# EAGLE board geikoduino_328p_DIP_final (EAGLE 7.6.0)
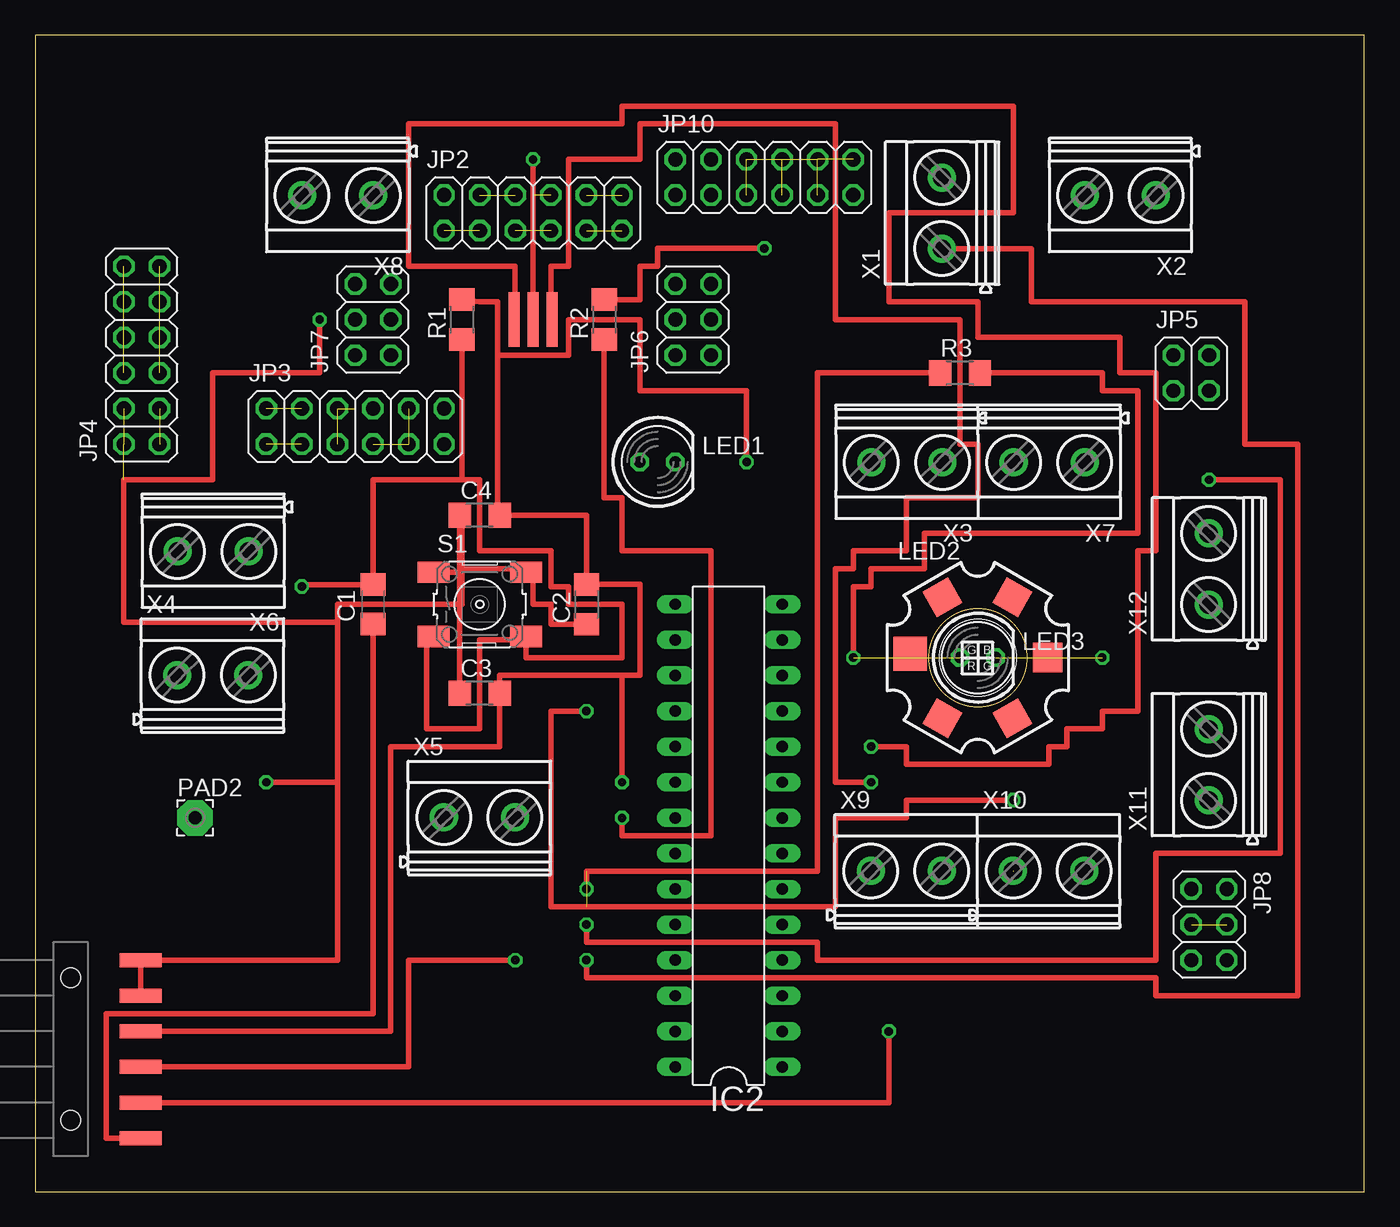
[diagram p0: board, top side]
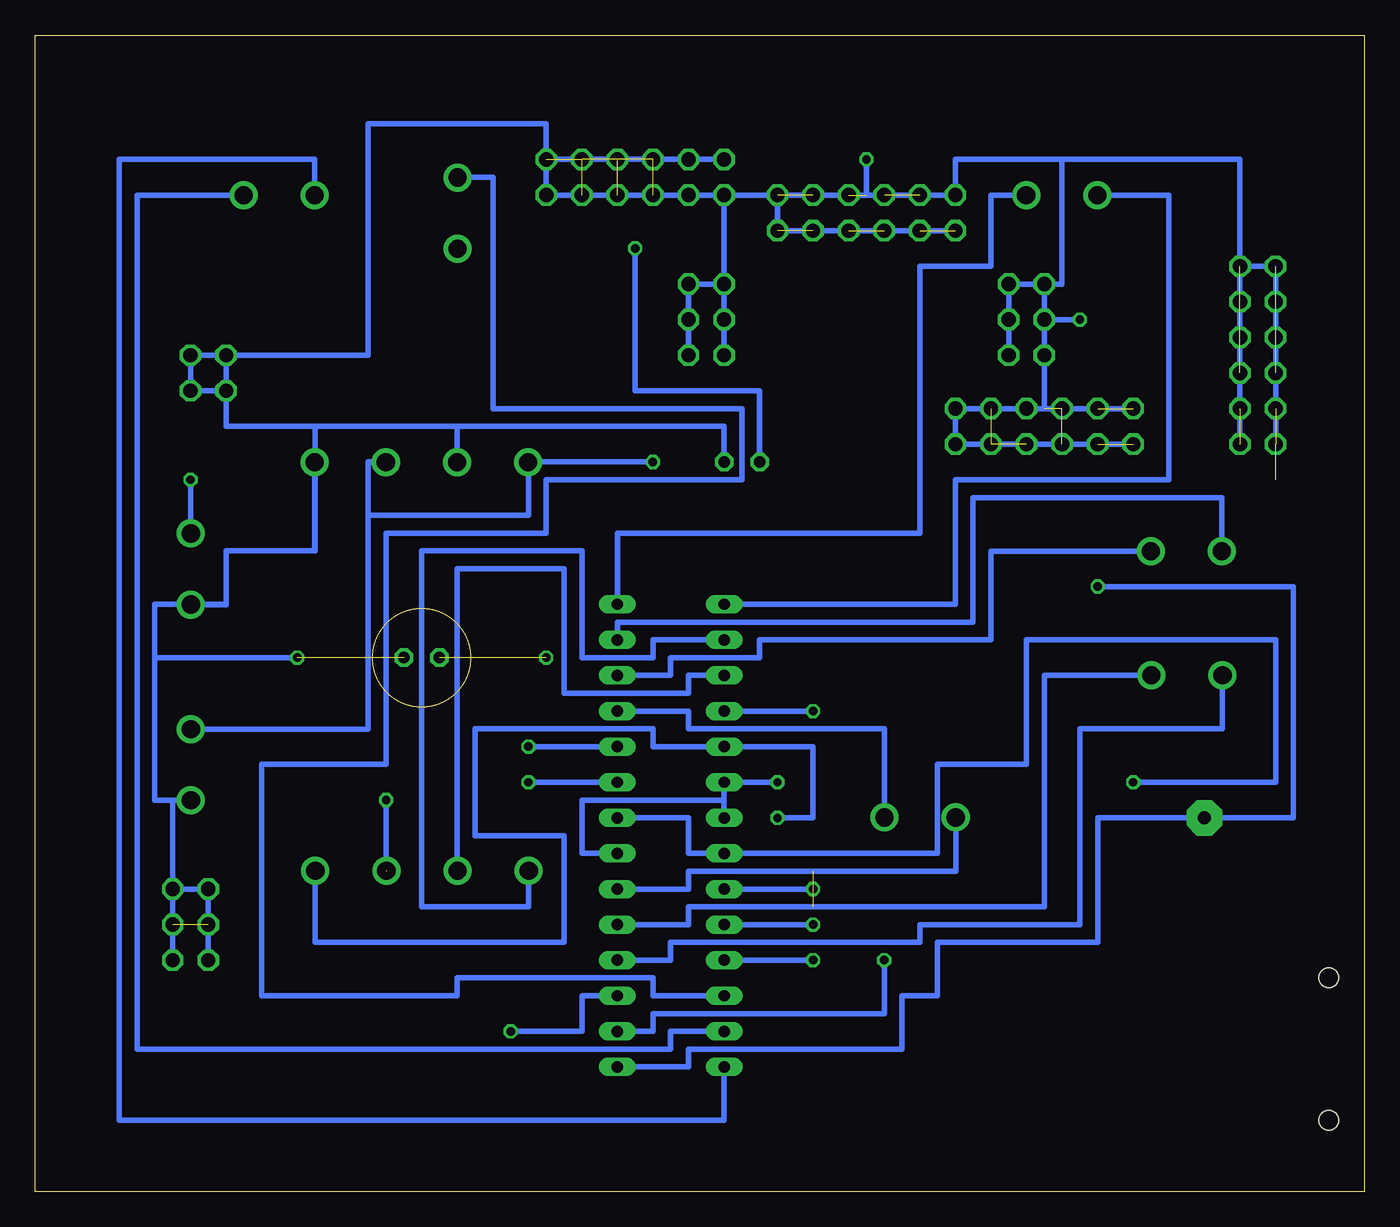
[diagram p1: board, bottom side, seen from below]

Size 94.92 x 82.54 mm. Coordinates in mm from the lower left corner, seen from the top.
Outline: 0,0 94.92,0 94.92,82.54 0,82.54 0,0
Copper layers (1*16): Top 0.035mm / dielectric 1.5mm / Bottom 0.035mm
Design rules "default": minimum track width 10mil, minimum drill 24mil, track to track 8mil, track to pad 8mil, pad to pad 8mil, via to via 8mil, smd to smd 8mil, copper to edge 40mil, drill to drill 8mil, minimum pad ring 10mil, minimum via ring 8mil, stop-mask expansion 4mil, vias tented up to drill 0mil, thermal gap 10mil

## Footprints (pad centres in the part's own frame; a part is rotated, then mirrored left to right if it is on the bottom)
C1206 = smd 1.6 x 1.8: 1 -1.4,0; 2 1.4,0
1206 = smd 1.6 x 1.803: 1 -1.422,0; 2 1.422,0
DIL28-3 = drill 0.813 long: 1 -16.51,-3.81; 2 -13.97,-3.81; 3 -11.43,-3.81; 4 -8.89,-3.81; 5 -6.35,-3.81; 6 -3.81,-3.81; 7 -1.27,-3.81; 8 1.27,-3.81; 9 3.81,-3.81; 10 6.35,-3.81; 11 8.89,-3.81; 12 11.43,-3.81; 13 13.97,-3.81; 14 16.51,-3.81; 15 16.51,3.81; 16 13.97,3.81; 17 11.43,3.81; 18 8.89,3.81; 19 6.35,3.81; 20 3.81,3.81; 21 1.27,3.81; 22 -1.27,3.81; 23 -3.81,3.81; 24 -6.35,3.81; 25 -8.89,3.81; 26 -11.43,3.81; 27 -13.97,3.81; 28 -16.51,3.81
1X06-SMD = smd 1 x 3: 1 -6.35,5; 2 -3.81,5; 3 -1.27,5; 4 1.27,5; 5 3.81,5; 6 6.35,5 | hole 1.4: -5.08,0; 5.08,0
2X06 = drill 1.016 octagon: 1 -6.35,-1.27; 2 -6.35,1.27; 3 -3.81,-1.27; 4 -3.81,1.27; 5 -1.27,-1.27; 6 -1.27,1.27; 7 1.27,-1.27; 8 1.27,1.27; 9 3.81,-1.27; 10 3.81,1.27; 11 6.35,-1.27; 12 6.35,1.27
2X02 = drill 1.016 octagon: 1 -1.27,-1.27; 2 -1.27,1.27; 3 1.27,-1.27; 4 1.27,1.27
2X03 = drill 1.016 octagon: 1 -2.54,-1.27; 2 -2.54,1.27; 3 0,-1.27; 4 0,1.27; 5 2.54,-1.27; 6 2.54,1.27
LED5MM = drill 0.813 octagon: A -1.27,0; K 1.27,0
ACULED-RGB = smd 2.1 x 2.1 rotated 60: BA 2.468,4.319 | smd 2.1 x 2.1: BC 4.983,0 | smd 2.1 x 2.1 rotated 300: GA 2.468,-4.319 | smd 2.1 x 2.1 rotated 120: GC -2.515,4.319 | smd 2.4 x 2.4: RA -4.825,0.285 | smd 2.1 x 2.1 rotated 240: RC -2.515,-4.319
2,54/0,9 = drill 0.914 pad 2.54 octagon: 1 0,0
6MM_SWITCH = smd 2.286 x 1.524: 1 -3.302,2.286; 2 3.302,2.286; 3 -3.302,-2.286; 4 3.302,-2.286
EFOBM = smd 0.8 x 3.9: 1 -1.35,0; 2 0,0; 3 1.35,0
MKDSN1,5/2-5,08 = drill 1.3 pad 2: 1 -2.561,0.025; 2 2.519,0.025

## Placement (x,y rotation side)
C1  .1uf  [C1206]  24.13,41.91 90 top
C2  1uf  [1206]  39.37,41.91 90 top
C3  .1uf  [1206]  31.75,35.56 0 top
C4  10uf  [1206]  31.75,48.26 0 top
IC2  ATMEGA328-20P  [DIL28-3]  49.53,25.4 90 top
JP1  [1X06-SMD]  2.54,10.16 270 top
JP2  [2X06]  35.56,69.85 0 top
JP3  [2X06]  22.86,54.61 0 top
JP4  [2X06]  7.62,59.69 90 top
JP5  [2X02]  82.55,58.42 0 top
JP6  [2X03]  46.99,62.23 90 top
JP7  [2X03]  24.13,62.23 90 top
JP8  [2X03]  83.82,19.05 270 top
JP10  [2X06]  52.07,72.39 0 top
LED1  [LED5MM]  44.45,52.07 0 top
LED2  ACULED-RGB  [ACULED-RGB]  67.31,38.1 0 top
LED3  [LED5MM]  67.31,38.1 0 top
PAD2  WIREPAD2,54/0,9  [2,54/0,9]  11.43,26.67 0 top
R1  10k  [1206]  30.48,62.23 90 top
R2  499  [1206]  40.64,62.23 90 top
R3  7.14  [1206]  66.04,58.42 0 top
S1  [6MM_SWITCH]  31.75,41.91 0 top
U$2  RESONATOREFOB  [EFOBM]  35.56,62.23 0 top
X1  MKDSN1,5/2-5,08  [MKDSN1,5/2-5,08]  64.77,69.85 90 top
X2  MKDSN1,5/2-5,08  [MKDSN1,5/2-5,08]  77.47,71.12 180 top
X3  MKDSN1,5/2-5,08  [MKDSN1,5/2-5,08]  62.23,52.07 180 top
X4  MKDSN1,5/2-5,08  [MKDSN1,5/2-5,08]  12.7,36.83 0 top
X5  MKDSN1,5/2-5,08  [MKDSN1,5/2-5,08]  31.75,26.67 0 top
X6  MKDSN1,5/2-5,08  [MKDSN1,5/2-5,08]  12.7,45.72 180 top
X7  MKDSN1,5/2-5,08  [MKDSN1,5/2-5,08]  72.39,52.07 180 top
X8  MKDSN1,5/2-5,08  [MKDSN1,5/2-5,08]  21.59,71.12 180 top
X9  MKDSN1,5/2-5,08  [MKDSN1,5/2-5,08]  62.23,22.86 0 top
X10  MKDSN1,5/2-5,08  [MKDSN1,5/2-5,08]  72.39,22.86 0 top
X11  MKDSN1,5/2-5,08  [MKDSN1,5/2-5,08]  83.82,30.48 90 top
X12  MKDSN1,5/2-5,08  [MKDSN1,5/2-5,08]  83.82,44.45 90 top

## Library data of the parts
C1 = rcl
C2-C4 R1-R3 S1 = ng
IC2 = atmega328
JP1 = SparkFun
JP2-JP8 JP10 = pinhead
LED1-LED3 = led
PAD2 = wirepad
U$2 = fab
X1-X12 = con-phoenix-508

## Nets
DTR: C1.1 JP1.6
GND: C2.1 C3.1 C4.1 IC2.8 IC2.22 JP1.1 JP1.2 JP2.1 JP2.2 JP2.3 JP2.4 JP2.5 JP2.6 JP2.7 JP2.8 JP2.9 JP2.10 JP2.11 JP2.12 JP3.1 JP3.2 JP3.3 JP3.4 JP3.5 JP3.6 JP3.7 JP3.8 JP3.9 JP3.10 JP3.11 JP3.12 JP4.1 JP4.2 JP4.3 JP4.4 JP4.5 JP4.6 JP4.7 JP4.8 JP4.9 JP4.10 JP4.11 JP4.12 JP6.2 JP10.1 JP10.2 JP10.3 JP10.4 JP10.5 JP10.6 JP10.7 JP10.8 JP10.9 JP10.10 JP10.11 JP10.12 LED1.K LED3.K S1.1 S1.2 U$2.2 X3.1 X7.1 X11.1 X12.1
MISO: IC2.18 X10.1
MOSI: IC2.17 X9.2
N$1: IC2.10 U$2.1
N$2: IC2.14 X8.1
N$3: IC2.23 R3.1
N$4: IC2.24 X12.2
N$5: IC2.25 X1.1
N$6: IC2.26 X1.2
N$7: IC2.27 X2.1
N$8: IC2.28 X2.2
N$9: IC2.9 U$2.3
N$10: IC2.4 X4.1
N$11: IC2.5 X4.2
N$12: IC2.6 X5.1
N$13: IC2.11 X5.2
N$14: IC2.12 X6.1
N$15: IC2.13 X6.2
N$16: LED1.A R2.2
N$17: IC2.15 X8.2
N$18: IC2.16 X9.1
N$19: LED3.A R3.2
N$20: JP5.1 JP5.2 JP5.3 JP5.4 JP6.1 JP6.3 JP6.5 JP6.6 JP7.1 JP7.2 JP7.3 JP7.4 JP7.5 JP7.6 JP8.1 JP8.2 JP8.3 JP8.4 JP8.5 JP8.6
RST: C1.2 IC2.1 PAD2.1 R1.1 S1.3 S1.4
RX: IC2.2 JP1.4
SCK: IC2.19 R2.1 X10.2
TX: IC2.3 JP1.5
VCC: C2.2 C3.2 C4.2 IC2.7 IC2.20 IC2.21 JP1.3 R1.2 X3.2 X7.2 X11.2

## Tracks (layer width: path | path; a pad name or v marks a point on that pad's centre or on a via)
DTR
  Top 0.406: C1.1 24.13,12.7 5.08,12.7 5.08,3.81 JP1.6
GND  (via drill 0.6)  (28 unrouted)
  Top 0.406: 30.33,41.91 21.59,41.91 21.59,40.64 | 30.33,41.91 C3.1 | S1.1 30.33,44.2 | 30.33,44.2 30.33,41.91 | 30.33,44.45 C4.1 30.48,48.26 30.48,41.91 30.33,41.91 | 30.33,44.45 30.33,44.2 | 35.56,44.2 S1.2 34.29,44.2 34.29,44.45 | 35.56,44.2 35.56,44.45 34.29,44.45 | 39.37,40.64 C2.1 36.83,40.49 36.83,41.91 35.56,41.91 35.56,44.2 | 34.29,44.45 30.33,44.45 | U$2.2 v35.56,73.66 | 21.59,40.64 21.59,29.21 | 21.59,29.21 v16.51,29.21 | 21.59,40.64 6.35,40.64 6.35,50.8 12.7,50.8 12.7,58.42 20.32,58.42 v20.32,62.23 | 21.59,29.21 21.59,16.51 JP1.1 JP1.2
  Bottom 0.406: JP2.1 JP2.5 JP2.11 JP2.12 | JP2.6 JP2.2 | JP10.4 JP10.2 JP10.12 JP10.11 | JP3.2 22.86,55.88 | 22.86,55.88 JP3.8 JP3.12 JP3.11 JP3.9 JP3.1 | IC2.8 48.26,26.67 48.26,24.13 IC2.22 30.48,24.13 30.48,30.48 24.13,30.48 24.13,39.37 6.35,39.37 6.35,29.21 v16.51,29.21 | X11.1 86.36,27.92 86.36,38.1 | X12.1 81.28,41.89 81.28,41.91 | 74.93,52.07 74.93,45.72 74.95,45.72 | 74.93,54.61 74.93,52.05 X7.1 74.95,45.72 | 74.93,54.61 64.77,54.61 | 64.77,54.61 45.72,54.61 LED1.K | X3.1 64.77,52.05 64.77,54.61 | JP10.11 JP10.3 JP10.1 | JP10.1 JP2.12 | 74.95,45.72 81.28,45.72 81.28,41.91 | 81.28,41.91 86.36,41.91 86.36,38.1 | 86.36,38.1 v76.2,38.1 | JP4.2 JP4.12 JP4.11 | JP4.1 JP4.11 | JP4.11 8.89,73.66 29.21,73.66 JP2.2 | JP6.2 JP10.1 | JP10.1 JP10.11 | JP10.11 58.42,76.2 71.12,76.2 71.12,59.69 81.28,59.69 81.28,54.61 74.93,54.61 | JP2.12 35.56,71.12 | 35.56,71.12 v35.56,73.66 | 22.86,55.88 22.86,62.23 | 22.86,62.23 22.86,64.77 21.59,64.77 21.59,72.39 | JP2.2 35.56,71.12 | 22.86,62.23 v20.32,62.23
MISO  (via drill 0.6)  (3 unrouted)
  Top 0.406: v39.37,34.29 36.83,34.29 36.83,20.32 57.15,20.32 57.15,26.67 62.23,26.67 62.23,27.94 v69.85,27.94
  Bottom 0.406: IC2.18 v39.37,34.29 | 69.85,22.86 v69.85,27.94
MOSI
  Bottom 0.406: IC2.17 48.26,36.83 48.26,35.56 57.15,35.56 57.15,44.45 64.77,44.45 64.77,22.89 | X9.2 64.77,22.89 | 64.77,22.89 64.77,22.86
N$1  (via drill 0.6)  (1 unrouted)
  Top 0.406: U$2.1 34.29,62.23 34.29,66.04 26.67,66.04 26.67,76.2 41.91,76.2 41.91,77.47 69.85,77.47 69.85,69.85 60.96,69.85 60.96,63.5 67.31,63.5 67.31,60.96 77.47,60.96 77.47,58.42 80.01,58.42 80.01,45.72 78.74,45.72 78.74,34.29 76.2,34.29 76.2,33.02 73.66,33.02 73.66,31.75 72.39,31.75 72.39,30.48 62.23,30.48 62.23,31.75 v59.69,31.75
  Bottom 0.406: IC2.10 v59.69,31.75
N$2
  Bottom 0.406: IC2.14 53.34,46.99 31.75,46.99 31.75,66.04 26.67,66.04 26.67,71.12 24.15,71.12 X8.1
N$3  (via drill 0.6)  (2 unrouted)
  Top 0.406: R3.1 55.88,58.42 55.88,22.86 39.37,22.86 v39.37,21.59
  Bottom 0.406: IC2.23 v39.37,21.59
N$4  (via drill 0.6)  (3 unrouted)
  Top 0.406: v83.82,50.8 88.9,50.8 88.9,24.13 80.01,24.13 80.01,16.51 55.88,16.51 55.88,17.78 39.37,17.78 v39.37,19.05
  Bottom 0.406: X12.2 83.82,46.97 v83.82,50.8 | IC2.24 v39.37,19.05
N$5  (via drill 0.6)  (1 unrouted)
  Top 0.406: X1.1 71.12,67.29 71.12,63.5 86.36,63.5 86.36,53.34 90.17,53.34 90.17,13.97 80.01,13.97 80.01,15.24 39.37,15.24 v39.37,16.51
  Bottom 0.406: IC2.25 v39.37,16.51
N$6
  Bottom 0.406: IC2.26 50.8,13.97 50.8,15.24 64.77,15.24 64.77,13.97 78.74,13.97 78.74,30.48 69.85,30.48 69.85,46.99 58.42,46.99 58.42,50.8 44.45,50.8 44.45,55.88 62.23,55.88 62.23,72.39 64.75,72.39 X1.2
N$7
  Bottom 0.406: IC2.27 49.53,11.43 49.53,10.16 87.63,10.16 87.63,71.12 80.03,71.12 X2.1
N$8
  Bottom 0.406: IC2.28 45.72,5.08 88.9,5.08 88.9,73.66 74.95,73.66 X2.2
N$9  (via drill 0.6)  (1 unrouted)
  Top 0.406: U$2.3 36.83,62.23 36.83,66.04 38.1,66.04 38.1,73.66 43.18,73.66 43.18,76.2 57.15,76.2 57.15,62.23 66.04,62.23 66.04,53.34 67.31,53.34 67.31,49.53 62.23,49.53 62.23,45.72 58.42,45.72 58.42,44.45 57.15,44.45 57.15,29.21 v59.69,29.21
  Bottom 0.406: IC2.9 v59.69,29.21
N$10
  Bottom 0.406: X4.1 10.16,36.85 10.16,33.02 20.32,33.02 20.32,19.05 31.75,19.05 31.75,17.78 49.53,17.78 49.53,16.51 IC2.4
N$11
  Bottom 0.406: IC2.5 48.26,19.05 48.26,20.32 22.86,20.32 22.86,36.83 15.22,36.83 X4.2
N$12
  Bottom 0.406: IC2.6 48.26,21.59 48.26,22.86 29.19,22.86 X5.1
N$13
  Bottom 0.406: IC2.11 48.26,34.29 48.26,33.02 34.27,33.02 X5.2
N$14
  Bottom 0.406: X6.1 26.67,45.7 26.67,39.37 43.18,39.37 43.18,38.1 49.53,38.1 49.53,36.83 IC2.12
N$15
  Bottom 0.406: X6.2 10.18,49.53 27.94,49.53 27.94,40.64 53.34,40.64 IC2.13
N$16  (via drill 0.6)  (1 unrouted)
  Top 0.406: R2.2 43.18,63.65 43.18,66.04 44.45,66.04 44.45,67.31 v52.07,67.31
  Bottom 0.406: LED1.A 43.18,57.15 52.07,57.15 v52.07,67.31
N$17
  Bottom 0.406: IC2.15 29.21,41.91 29.21,50.8 13.97,50.8 13.97,71.12 19.07,71.12 X8.2
N$18
  Bottom 0.406: IC2.16 50.8,39.37 50.8,38.1 55.88,38.1 55.88,45.72 67.31,45.72 67.31,20.32 59.67,20.32 X9.1
N$19  (via drill 0.6)  (1 unrouted)
  Top 0.406: v58.42,38.1 58.42,43.18 59.69,43.18 59.69,44.45 63.5,44.45 63.5,46.99 78.74,46.99 78.74,57.15 76.2,57.15 76.2,58.42 R3.2
N$20  (1 unrouted)
  Bottom 0.406: JP7.2 JP7.4 JP7.6 | JP6.3 JP6.1 JP6.5 JP6.6 45.72,71.12 | JP7.1 JP7.3 JP7.5 JP7.6 | JP5.2 JP5.4 JP5.3 JP5.1 | JP8.5 JP8.3 JP8.1 JP8.2 | JP8.2 JP8.6 | JP5.1 JP5.2 | JP5.2 71.12,59.69 71.12,76.2 58.42,76.2 58.42,71.12 45.72,71.12 | 45.72,71.12 29.21,71.12 29.21,73.66 21.59,73.66 21.59,64.77 JP7.6 | JP8.2 85.09,27.94 | 85.09,27.94 83.82,27.94 | JP5.1 81.28,54.61 74.93,54.61 74.93,45.72 81.28,45.72 81.28,41.91 86.36,41.91 86.36,27.94 85.09,27.94
RST  (via drill 0.6)  (1 unrouted)
  Top 0.406: S1.3 27.94,39.62 27.94,33.02 31.75,33.02 31.75,39.37 35.05,39.37 S1.4 35.05,38.1 41.91,38.1 41.91,41.91 38.1,41.91 38.1,43.18 36.83,43.18 36.83,45.72 31.75,45.72 31.75,50.8 30.48,50.8 | 30.48,50.8 24.13,50.8 C1.2 19.05,43.31 v19.05,43.18 | 30.48,50.8 R1.1
  Bottom 0.406: IC2.1 48.26,8.89 48.26,10.16 33.02,10.16 33.02,13.97 30.48,13.97 30.48,17.78 19.05,17.78 19.05,26.67 PAD2.1 5.08,26.67 5.08,43.18 v19.05,43.18
RX  (via drill 0.6)  (1 unrouted)
  Top 0.406: v34.29,16.51 26.67,16.51 26.67,8.89 JP1.4
  Bottom 0.406: IC2.2 50.8,11.43 50.8,12.7 34.29,12.7 v34.29,16.51
SCK  (via drill 0.6)  (1 unrouted)
  Top 0.406: R2.1 40.64,49.53 41.91,49.53 41.91,45.72 48.26,45.72 48.26,25.4 41.91,25.4 v41.91,26.67
  Bottom 0.406: X10.2 74.91,17.78 57.15,17.78 57.15,25.4 63.5,25.4 63.5,33.02 50.8,33.02 50.8,31.75 IC2.19 39.37,31.75 39.37,26.67 v41.91,26.67
TX  (via drill 0.6)
  Top 0.406: v60.96,11.43 60.96,6.35 JP1.5
  Bottom 0.406: IC2.3 55.88,13.97 55.88,11.43 v60.96,11.43
VCC  (via drill 0.6)  (2 unrouted)
  Top 0.406: 33.02,59.69 33.02,63.5 31.75,63.5 R1.2 | 41.91,36.83 43.18,36.83 43.18,43.33 C2.2 39.37,48.26 C4.2 33.02,48.26 33.02,59.69 | 41.91,36.83 v41.91,29.21 | 41.91,36.83 33.17,36.83 C3.2 33.17,31.75 25.4,31.75 25.4,11.43 JP1.3 | 33.02,59.69 38.1,59.69 38.1,62.23 43.18,62.23 43.18,57.15 50.8,57.15 v50.8,52.07
  Bottom 0.406: 71.12,48.26 71.12,52.07 69.87,52.07 X7.2 | X3.2 59.69,52.05 | 59.69,52.05 59.69,48.26 71.12,48.26 | 59.69,52.05 59.69,52.07 v50.8,52.07 | X11.2 71.12,33 71.12,48.26 | 45.72,27.94 IC2.20 v41.91,29.21 | 45.72,27.94 IC2.21 | IC2.7 55.88,24.13 55.88,27.94 45.72,27.94